# Altium PCB PCB1.PcbDoc
Units mil, origin at the board's own origin, x right, y up, seen from the top; angles counter-clockwise.
Board outline 1850.39 x 4645.67 mil, 2 copper layers (Top Layer, Bottom Layer), stack 62.8 mil thick; 14 components, 10 nets, 65 pads, 0 vias.
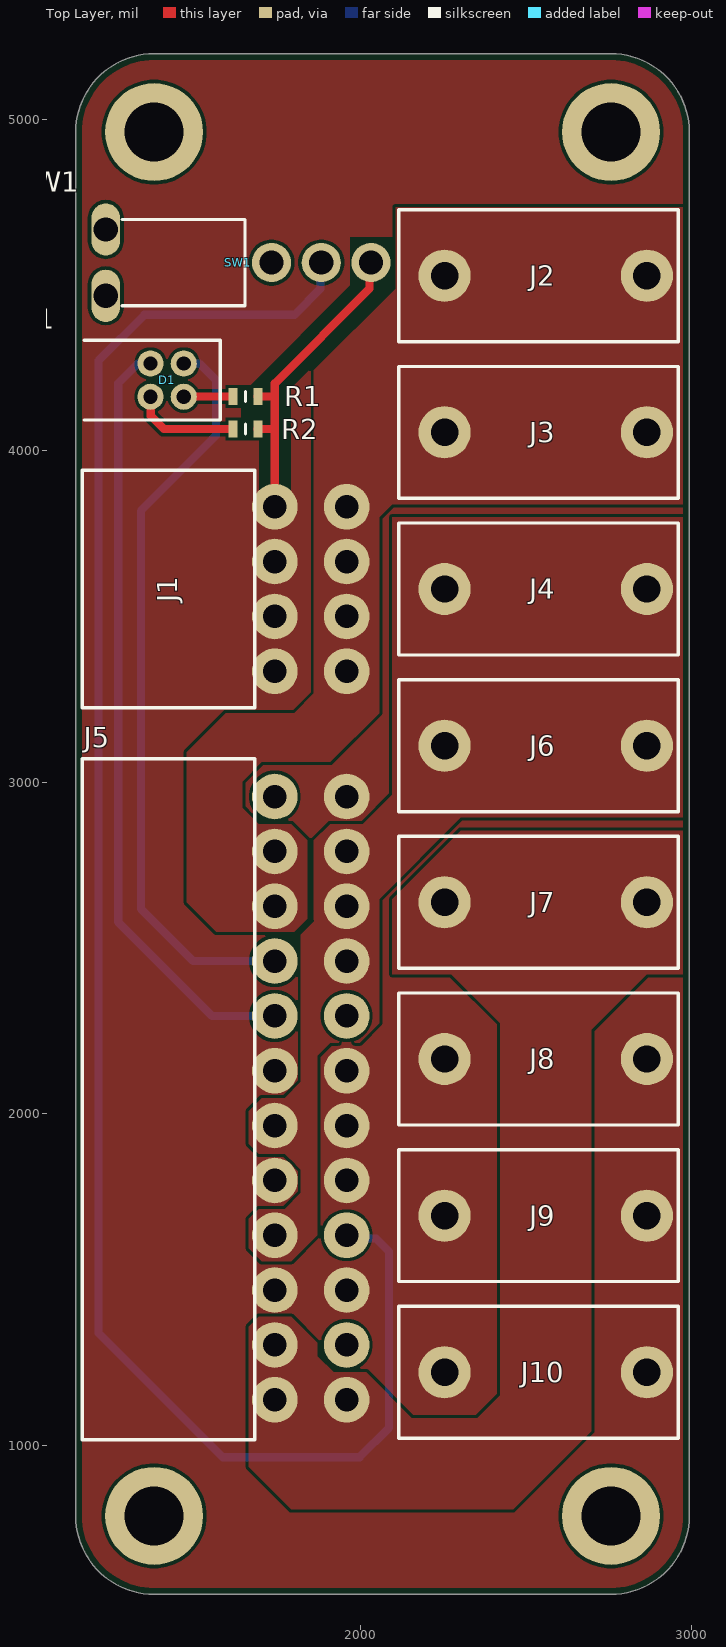
[diagram p0: Top Layer view]
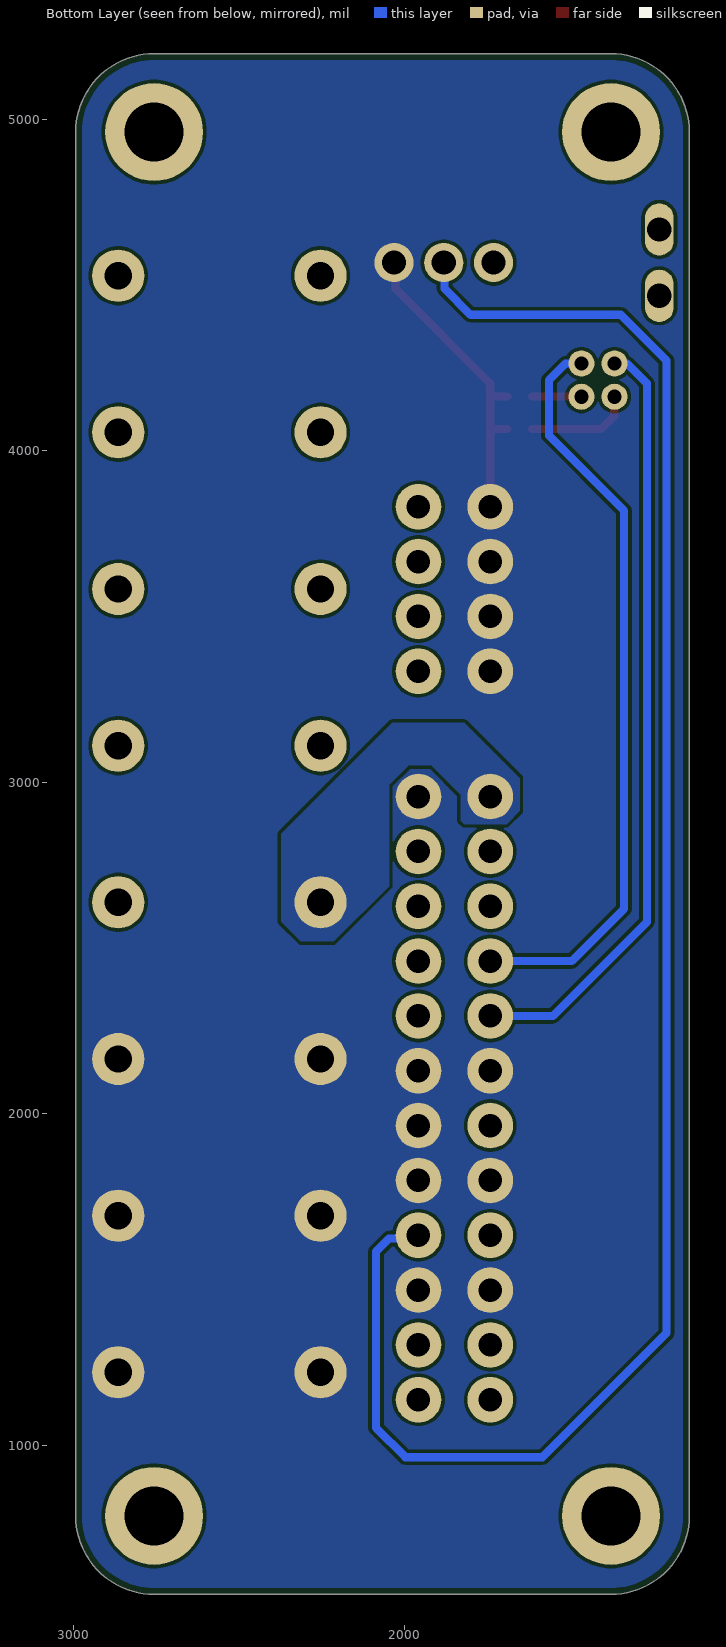
[diagram p1: Bottom Layer view, seen from below]

## Layer stack, top to bottom
Top Solder: solder mask 0.4, Solder Resist, Dk 3.5
Top Layer: signal copper 1.4
Dielectric 1: dielectric 60, FR-4, Dk 4.8
Bottom Layer: signal copper 1.4
Bottom Solder: solder mask 0.4, Solder Resist, Dk 3.5

## Board outline
1141.73,787.4 1141.73,4960.63 cw(c1377.95,4960.63) 1377.95,5196.85 2755.91,5196.85 cw(c2755.91,4960.63) 2992.13,4960.63 2992.13,787.4 cw(c2755.91,787.4) 2755.91,551.18 1377.95,551.18 cw(c1377.95,787.4)

## Design rules (kind name [scope] priority, off if disabled: settings)
Clearance [All] p1: gap=10 ignorepadtopadclearanceinfootprint=FALSE
PlaneClearance [All] p1: clearance=25
PlaneConnect [All] p1: planeconnectstyle=Direct reliefexpansion=20 reliefentries=4 reliefconductorwidth=10 reliefairgap=10
PolygonConnect [All] p1: connectstyle=Direct reliefconductorwidth=10 reliefentries=4 polygonreliefangle="90 Angle" airgapwidth=10
RoutingVias [All] p1: holewidth=28 width=50 viastyle="Through Hole" minholewidth=28 minwidth=50 maxholewidth=28 maxwidth=50
SolderMaskExpansion [All] p1: expansion=4 istentingtop=FALSE
Width [All] p1: maxlimit=25 minlimit=25 preferedwidth=25
28 further rules are at their usual default settings.

## Components (designator, comment, footprint, x,y, rotation, side; value= is the part's Value field where it differs from the comment)
D1 "DUAL INDICATOR 5MM" "Dialight 552-0232F" 1417.32,4212.6 r0 top
J1 "0469911008" "PCIE 8P POWER" 1850.39,3582.68 r270 top
J2 "24.243.3" "BANANA YL" 2559.06,4527.56 r0 top
J3 "24.243.3" "BANANA YL" 2559.06,4055.12 r0 top
J4 "24.243.1" "BANANA RD" 2559.06,3582.68 r0 top
J5 "0469911024" "ATX 24P POWER" 1850.39,2047.24 r270 top
J6 "24.243.1" "BANANA RD" 2559.06,3110.24 r0 top
J7 "24.243.4" "BANANA GR" 2559.06,2637.8 r0 top
J8 "24.243.2" "BANANA BK" 2559.06,2165.35 r0 top
J9 "24.243.2" "BANANA BK" 2559.06,1692.91 r0 top
J10 "24.243.2" "BANANA BK" 2559.06,1220.47 r0 top
R1 "140R" 0805 1653.54,4163.39 r180 top
R2 "140R" 0805 1653.54,4064.96 r180 top
SW1 "SWITCH" 7101SD9AV2BE 1732.28,4566.93 r0 top

## Footprints (in the part's own frame and the unit in brackets; to place one, negate y for a bottom-side part, rotate by r counter-clockwise, add the part's x,y. Pads: shape width x height; smd on the part's side, far side on the other; paste and mask are expansions set on the pad)
0805 [mm] "SMD 0805"
  rect 0.7x1.3 smd: 1(-0.95,0) 2(0.95,0)
  silkscreen extent 0,-0.38 0,0.38, body extent -1,-0.6 1,0.6, height 1.1
7101SD9AV2BE [mm] "Toogle Switch"
  oval 2.2x4 hole 1.85: 1(-12.7,-2.54) 1(-12.7,2.54)
  round 3 hole 1.85: 1(0,0) 2(3.81,0) 3(7.62,0)
  silkscreen extent -11.43,-3.3 -2.03,3.3, body extent -19.81,-3.3 -2.03,3.3, height 12.7
"ATX 24P POWER" [mm] "Molex MiniFit Jr 0469911024"
  round 3.5 hole 1.8: 1(23.1,-2.75) 2(18.9,-2.75) 3(14.7,-2.75) 4(10.5,-2.75) 5(6.3,-2.75) 6(2.1,-2.75) 7(-2.1,-2.75) 8(-6.3,-2.75) 9(-10.5,-2.75) 10(-14.7,-2.75) 11(-18.9,-2.75) 12(-23.1,-2.75) 13(23.1,2.75) 14(18.9,2.75) 15(14.7,2.75) 16(10.5,2.75) 17(6.3,2.75) 18(2.1,2.75) 19(-2.1,2.75) 20(-6.3,2.75) 21(-10.5,2.75) 22(-14.7,2.75) 23(-18.9,2.75) 24(-23.1,2.75)
  silkscreen extent -26.01,-17.5 26.17,-4.3, body extent -26.05,-17.4 26.2,3.33, height 11
"BANANA BK" [mm] "Multicomp 24.243.2"
  round 4 hole 2.1: 1(-7.75,0) 1(7.75,0)
  silkscreen extent -11.25,-5.05 10.15,5.05, body extent -11.25,-5.05 12.75,5.05, height 13
"BANANA GR" [mm] "Multicomp 24.243.4"
  round 4 hole 2.1: 1(-7.75,0) 1(7.75,0)
  silkscreen extent -11.25,-5.05 10.15,5.05, body extent -11.25,-5.05 12.75,5.05, height 13
"BANANA RD" [mm] "Multicomp 24.243.1"
  round 4 hole 2.1: 1(-7.75,0) 1(7.75,0)
  silkscreen extent -11.25,-5.05 10.15,5.05, body extent -11.25,-5.05 12.75,5.05, height 13
"BANANA YL" [mm] "Multicomp 24.243.3"
  round 4 hole 2.1: 1(-7.75,0) 1(7.75,0)
  silkscreen extent -11.25,-5.05 10.15,5.05, body extent -11.25,-5.05 12.75,5.05, height 13
"Dialight 552-0232F" [mm] "Dialight 552-0232F"
  round 2 hole 1.09: 1(-1.27,-1.27) 2(-1.27,1.27) 3(1.27,-1.27) 4(1.27,1.27)
  silkscreen extent -6.35,-3.05 4.06,3.05, body extent -11.87,-3.05 4.06,3.05, height 12.52
"PCIE 8P POWER" [mm] "Molex MiniFit Jr 0469911008"
  round 3.5 hole 1.8: 1(6.3,-2.75) 2(2.1,-2.75) 3(-2.1,-2.75) 4(-6.3,-2.75) 5(6.3,2.75) 6(2.1,2.75) 7(-2.1,2.75) 8(-6.3,2.75)
  silkscreen extent -9.1,-17.5 9.1,-4.3, body extent -9.25,-17.45 9.4,3.28, height 11

## Part data
D1: "Dialight 552-0232F Indicator", Ref=552-0232F
J1: library part "PCIE 8P", "Molex MiniFit Jr 8 pin, PCIe power connector", Ref=0469911008
J2 J3: library part "BANANA YELLOW", "Banana jack, PCB mount right angle", Ref=24.243.3
J4 J6: library part "BANANA RED", "Banana jack, PCB mount right angle", Ref=24.243.1
J5: library part "ATX 24P", "Molex MiniFit Jr 24 pin, ATX power connector", Ref=0469911024
J7: library part "BANANA GREEN", "Banana jack, PCB mount right angle", Ref=24.243.4
J8 J9 J10: library part "BANANA BLACK", "Banana jack, PCB mount right angle", Ref=24.243.2
R1 R2: library part "RES 0805", "805 Resistor"
SW1: "Right-Angle Toogle Switch", Ref="7101SD9AV2BE, 100SP1T2B4M7QE"

## Free pads (board coordinates)
  round 295.28 hole 177.17: 4(1377.95,787.4) 4(1377.95,4960.63) 4(2755.91,787.4) 4(2755.91,4960.63)

## Nets (pads, with @x,y where several pads share a name; then routed paths per layer and width w, separated by ;. In a path a pad name is that pad's centre, name@x,y a point inside that pad or via, vN(x,y) a via of type N, cw(c..) or ccw(c..) an arc to the next point about the centre after c; other vN are vias at no path point)
3V3: J5.1 J5.2 J5.12 J5.13 J7.1
5V: J4.1 J5.4 J5.6 J5.21 J5.22 J5.23 J6.1
5VSTB: D1.4 J5.9 | length 2275.4
  Bottom Layer w25: D1.4 1514.96,4262.6 1564.96,4212.6 1564.96,4045.28 1338.58,3818.9 1338.58,2618.11 1496.06,2460.63 J5.9
12V: J1.5 J1.6 J1.7 J1.8 J2.1 J3.1 J5.10 J5.11
-12V: J5.14
GND: J1.1 J1.2 J1.3 J1.4 J5.3 J5.5 J5.7 J5.15 J5.17 J5.18 J5.19 J5.24 J8.1 J9.1 J10.1 R1.1 R2.1 SW1.3 | length 958.8
  Top Layer w25: R2.1 1742.13,4064.96 ; R1.1 1742.13,4163.39 ; J1.4 1742.13,4064.96 ; SW1.3 2027.56,4562.2 2027.56,4488.19 1742.13,4202.76 1742.13,4163.39 ; 1742.13,4064.96 1742.13,4163.39
NetD1_1: D1.1 R2.2 | length 322.9
  Top Layer w25: D1.1 1368.11,4161.81 1368.11,4104.33 1407.48,4064.96 R2.2
NetD1_3: D1.3 R1.2 | length 149.1
  Top Layer w25: D1.3 1467.72,4162.99 1615.75,4162.99 R1.2
"P\O\W\E\R\ \O\N\": J5.16 SW1.2 | length 5519.2
  Bottom Layer w25: SW1.2 1879.92,4564.57 1879.92,4488.19 1801.18,4409.45 1348.43,4409.45 1210.63,4271.65 1210.63,1338.58 1584.65,964.57 1998.03,964.57 2086.61,1053.15 2086.61,1584.65 2047.24,1624.02 1968.5,1624.02 J5.16
"POWER OK": D1.2 J5.8 | length 2354.1
  Top Layer w10: D1.2@1354.73,4250.01 D1.2
  Bottom Layer w25: D1.2 1329.53,4262.6 1289.37,4222.44 1269.68,4202.76 1269.68,2578.74 1553.15,2295.28 J5.8
pads on no net: J5.20 SW1.1

## Polygon pours and split planes (outlines as drawn)
GND on Top Layer "NONET_L-01_P-001" (solid, pour order 5): 1161.42,4960.63 cw(c1377.95,4960.63) 1377.95,5177.16 2755.91,5177.17 cw(c2755.91,4960.63) 2972.44,4960.63 2972.44,787.4 cw(c2755.91,787.4) 2755.91,570.87 1377.95,570.87 cw(c1377.95,787.4) 1161.42,787.4
5V on Top Layer "NONET_L-01_P-001" (solid, pour order 1): 1663.39,1683.07 1692.91,1712.6 1771.65,1712.6 1820.87,1761.81 1820.87,1830.71 1771.65,1879.92 1692.91,1879.92 1663.39,1909.45 1663.39,2007.87 1702.76,2047.24 1771.65,2047.24 1820.87,2096.46 1820.87,2539.37 1860.24,2578.74 1860.43,2578.74 1860.24,2588.58 1860.24,2824.8 1909.45,2874.02 2007.87,2874.02 2096.46,2962.6 2096.46,3799.21 2972.44,3799.21 2972.44,2893.7 2303.15,2893.7 2057.09,2647.64 2057.09,2273.62 1998.03,2214.57 1909.45,2214.57 1870.08,2175.2 1870.08,1633.86 1791.34,1555.12 1702.76,1555.12 1663.39,1594.49
3V3 on Top Layer "NONET_L-01_P-001" (solid, pour order 2): 1791.34,1387.8 1870.08,1309.06 1870.08,1269.68 1919.29,1220.47 2017.72,1220.47 2155.51,1082.68 2352.36,1082.68 2421.26,1151.57 2421.26,2273.62 2273.62,2421.26 2096.46,2421.26 2096.46,2647.64 2303.15,2854.33 2972.44,2854.33 2972.44,2421.26 2864.17,2421.26 2696.85,2253.94 2696.85,1043.31 2460.63,807.09 1791.34,807.09 1663.39,935.04 1663.39,1358.27 1692.91,1387.8
12V on Top Layer "NONET_L-01_P-001" (solid, pour order 0): 1840.55,2824.8 1791.34,2874.02 1692.91,2874.02 1643.7,2923.23 1643.7,3001.97 1702.76,3061.02 1909.45,3061.02 2057.09,3208.66 2057.09,3799.21 2096.46,3838.58 2972.44,3838.58 2972.44,4734.25 2106.3,4734.25 2106.3,4488.19 1860.24,4242.13 1860.24,3267.72 1801.18,3208.66 1594.49,3208.66 1476.38,3090.55 1476.38,2637.8 1564.96,2549.21 1801.18,2549.21 1840.55,2588.58
GND on Bottom Layer "NONET_L-01_P-001" (solid, pour order 4): 1161.42,4960.63 cw(c1377.95,4960.63) 1377.95,5177.16 2755.91,5177.17 cw(c2755.91,4960.63) 2972.44,4960.63 2972.44,787.4 cw(c2755.91,787.4) 2755.91,570.87 1377.95,570.87 cw(c1377.95,787.4) 1161.42,787.4
3V3 on Bottom Layer "NONET_L-01_P-001" (solid, pour order 3): 2214.57,2519.68 2047.24,2687.01 2047.24,2992.13 1988.19,3051.18 1919.29,3051.18 1830.71,2962.6 1830.71,2883.86 1820.87,2874.02 1692.91,2874.02 1653.54,2913.39 1653.54,3011.81 1820.87,3179.13 2037.4,3179.13 2372.05,2844.49 2372.05,2578.74 2312.99,2519.68

## Other copper
Top Layer:
  pour cut-out: 1968.5,4645.67 2096.1,4645.67 2096.1,4492.41 1791.34,4187.65 1791.34,3799.21 1791.34,3789.37 1692.91,3789.37 1692.91,3799.21 1692.91,3818.9 1692.91,3838.58 1692.91,3848.43 1692.91,4029.37 1639.92,4029.37 1639.92,4198.98 1669.45,4198.98 1968.5,4498.03

## Silkscreen, mask and mechanical layers (free items; w line width, h text height)
Mechanical 1:
  lines w10: 1141.73,787.4 ccw(c1377.95,787.4) 1377.95,551.18 2755.91,551.18 ccw(c2755.91,787.4) 2992.13,787.4 2992.13,4960.63 ccw(c2755.91,4960.63) 2755.91,5196.85 1377.95,5196.85 ccw(c1377.95,4960.63) 1141.73,4960.63 1141.73,1062.99 1141.73,787.4

## Dimensions
2864.17,4527.56 to 2864.17,4055.12 on Mechanical 1
2755.91,4960.63 to 2864.17,4527.56 on Mechanical 1
1377.95,4960.63 to 1377.95,5196.85 on Mechanical 1
1141.73,4960.63 to 2992.13,4960.63 on Mechanical 1
1377.95,551.18 to 1377.95,5196.85 on Mechanical 1